# Allegro board CP210X_TEST_V10.brd
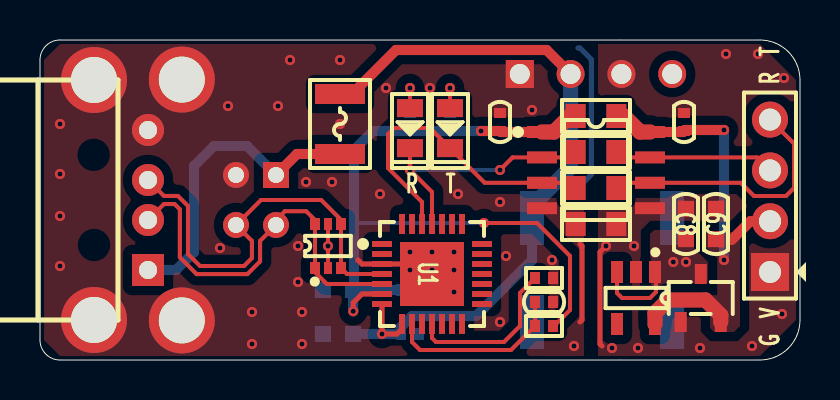
[diagram p0: board, top side]
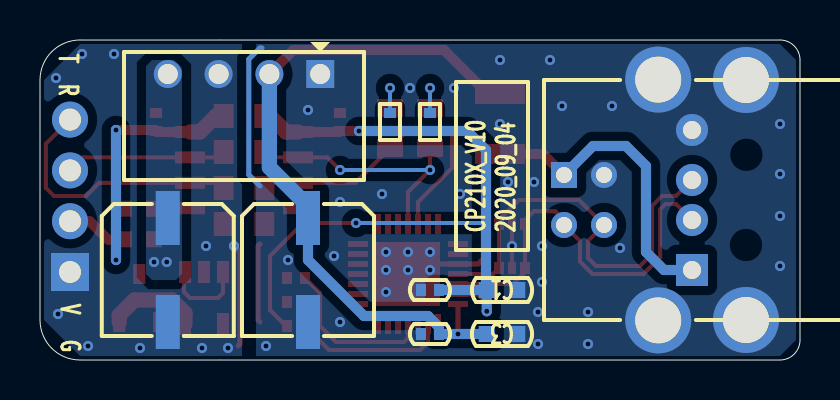
[diagram p1: board, bottom side, seen from below]

Outline 38 x 16 mm; copper layers: TOP, BOTTOM. Coordinates in mm from the lower left corner of the outline.
Outline path: 0,15 0,1 arc(0.29,0.29) 1,0 36,0 arc(37.41,0.59) 38,2 38,14 arc(37.41,15.41) 36,16 1,16 arc(0.29,15.71) 0,15

## Design rules (mm)
constraint set DEFAULT: min track width 0.203, pair gap 0.203
net group USB_D: nets USB_DM USB_DP

## Placement (name value [footprint] x y rotation side)
C1  10uF_10V  [C0603]  14.9 3.5 0 bottom
C2  100nF_50V  [C0402]  18.5 3.5 180 bottom
C3  10uF_10V  [C0603]  14.9 1.3 0 bottom
C4  100nF_50V  [C0402]  18.5 1.3 180 bottom
C5  100nF_50V  [C0402]  25.2 2.9 180 top
C6  220uF_10V  [CAP-6R3X7R7-SMD]  24.6 4.5 180 bottom
C7  220uF_10V  [CAP-6R3X7R7-SMD]  31.61 4.5 180 bottom
C8  10uF_10V  [C0603]  32.3 6.8 270 top
C9  10uF_10V  [C0603]  33.8 6.8 90 top
C10  100nF_50V  [C0402]  23 11.9 270 top
C11  100nF_50V  [C0402]  32.2 11.9 270 top
D1  LED_RED  [LED0805]  20.5 11.6 270 top
D2  LED_GREEN  [LED0805]  18.5 11.6 270 top
F1  SMD1210-200  [FUSE1210]  15 11.8 90 top
J1  -  [CN1X4-2P54-Z]  36.5 4.4 90 top
NOREF  -  []  0 0 0 top
NOREF#2  -  []  0 0 90 top
R1  10K  [R0402]  20.5 11.9 270 bottom
R2  10K  [R0402]  18.5 11.9 270 bottom
R3  10K  [R0402]  25.2 1.7 0 top
R4  10K  [R0402]  25.2 4.1 180 top
R5  0R/NI  [R0805]  27.8 12.2 0 top
R6  0R/NI  [R0805]  27.8 10.4 0 top
R7  0R/NI  [R0805]  27.8 8.6 0 top
R8  0R/NI  [R0805]  27.8 6.8 0 top
U1  CP2102-GMR  [QFN28-5X5X0R5-3R2X3R2]  19.6 4.3 270 top
U2  TPD4E1U06DCKR  [SOT363]  14.4 5.7 0 top
U3  -  [B0505S-1WR3]  27.8 14.3 0 bottom
U4  XC6206P332MR  [SOT23-3]  33.04 3.1 0 top
U5  ADUM1201BRZ  [SOIC8]  27.8 9.5 270 top
U6  SPX3819M5-L-3-3/NI  [SOT23-5]  29.8 3.1 180 top
USB1  -  [USB-A-MALE]  5.4 4.5 180 top
USB2  -  [USB-B]  11.8 8 180 bottom

## Library data of the parts
C1-C5 = CAP NP_2
C6 C7 = CAPT_100UF_3528_6r3V_10%_LXXXX
C8-C11 = CAP NP
D1 D2 = LED_4
F1 = FUSE
J1 = CONN RCPT 4
R1-R8 = R_Generic
U1 = CP2102_0
U2 = TPD4E1U06DBVR
U3 = B0505S-1WR2
U4 = XC6206P332MR
U5 = ADUM1201ARZ
U6 = SPX3819M5-L-1-2
USB1 = USB-A-MALE
USB2 = USB-B

## Footprints (pads in the part's own frame, mm; a bottom-side part is the same pattern mirrored in y, then rotated)
B0505S-1WR3
  rect 1.4x1.4 hole 1: 1(-3.81,0)
  round 1.4 hole 1: 2(-1.27,0) 3(1.27,0) 4(3.81,0)
C0402
  rect 0.5x0.6 smd: 1(-0.45,0) 2(0.45,0)
C0603
  rect 0.8x0.8 smd: 1(-0.762,0) 2(0.762,0)
CAP-6R3X7R7-SMD
  rect 1.2x2.7 smd: 1(0,2.6) 2(0,-2.6)
CN1X4-2P54-Z
  rect 1.9x1.9 hole 1.1: 1(0,0)
  round 1.8 hole 1.1: 2(2.54,0) 3(5.08,0) 4(7.62,0)
FUSE1210
  rect 1x2.5 smd: 1(-1.5,0) 2(1.5,0)
LED0805
  rect 0.9x1.3 smd: 1(-1,0) 2(1,0)
QFN28-5X5X0R5-3R2X3R2
  rect 0.3x1 smd: 1(-1.5,-2.5) 2(-1,-2.5) 3(-0.5,-2.5) 4(0,-2.5) 5(0.5,-2.5) 6(1,-2.5) 7(1.5,-2.5) 15(1.5,2.5) 16(1,2.5) 17(0.5,2.5) 18(0,2.5) 19(-0.5,2.5) 20(-1,2.5) 21(-1.5,2.5)
  rect 1x0.3 smd: 8(2.5,-1.5) 9(2.5,-1) 10(2.5,-0.5) 11(2.5,0) 12(2.5,0.5) 13(2.5,1) 14(2.5,1.5) 22(-2.5,1.5) 23(-2.5,1) 24(-2.5,0.5) 25(-2.5,0) 26(-2.5,-0.5) 27(-2.5,-1) 28(-2.5,-1.5)
  rect 3.2x3.2 smd: 29(0,0)
R0402
  rect 0.5x0.6 smd: 1(-0.45,0) 2(0.45,0)
R0805
  rect 1x1.2 smd: 1(-1.016,0) 2(1.016,0)
SOIC8
  rect 0.6x1.5 smd: 1(-1.9,-2.7) 2(-0.63,-2.7) 3(0.64,-2.7) 4(1.91,-2.7) 5(1.91,2.7) 6(0.64,2.7) 7(-0.63,2.7) 8(-1.9,2.7)
SOT23-3
  rect 0.6x1 smd: 1(-1,-1.2) 2(1,-1.2) 3(0,1.2)
SOT23-5
  rect 0.6x1.1 smd: 1(-0.95,-1.3) 2(0,-1.3) 3(0.95,-1.3) 4(0.95,1.3) 5(-0.95,1.3)
SOT363
  rect 0.5x0.6 smd: 1(-0.65,-1.1) 3(0.65,-1.1) 4(0.65,1.1) 6(-0.65,1.1)
  rect 0.4x0.6 smd: 2(0,-1.1) 5(0,1.1)
USB-A-MALE
  rect 1.6x1.6 hole 0.9: 1(0,0)
  round 1.6 hole 0.9: 2(0,-2.5) 3(0,-4.5) 4(0,-7)
  round 3.3 hole 2.3: 5(2.7,2.5) 6(2.7,-9.5)
USB-B
  rect 1.3x1.3 hole 0.8: 1(0,1.25)
  round 1.3 hole 0.8: 2(0,-1.25) 3(2,-1.25) 4(2,1.25)
  round 3.3 hole 2.3: 5(4.71,6.02) 6(4.71,-6.02)

## Nets
GND: C1.1 C2.1 C3.1 C4.1 C5.1 C6.2 C10.1 R4.1 R8.1 U1.3 U1.29 U2.2 U2.5(NC) U3.1 U5.4 USB1.4 USB1.5 USB1.6 USB2.4 USB2.5 USB2.6
GND_ISO: C7.2 C8.1 C9.2 C11.1 J1.1 R8.2 U3.3 U4.1(VSS) U5.5 U6.2
VCC_3.3V: C1.2 C2.2 C10.2 R1.2 R2.2 R3.2 R5.1 U1.6(VDD) U5.1
VCC_3.3V_ISO: C9.1 C11.2 J1.2 R5.2 U4.2 U5.8 U6.5(VOUT)
VCC_5V_ISO: C7.1 C8.2 U3.4 U4.3 U6.1 U6.3
VCC_USB: C3.2 C4.2 C6.1 F1.2 U1.7 U1.8 U3.2(VIN)
CP210X_RXD: D2.2(CATHODE) R6.1 U1.25 U5.2
CP210X_TXD: D1.2(CATHODE) R7.1 U1.26 U5.3
RXD: J1.3 R6.2 U5.7
TXD: J1.4 R7.2 U5.6(VOB)
USB_DM: U1.5 U2.1 U2.6 USB1.2 USB2.2
USB_DP: U1.4 U2.3 U2.4 USB1.3 USB2.3
N17444119: D1.1 R1.1
N17444149: C5.2 R3.1 U1.9
N17444179: D2.1 R2.1
N17494883: F1.1 USB1.1(VBUS) USB2.1(VBUS)
N17499797: R4.2 U1.11

Pads without a net: U1 1 2 10 12 13 14 15 16 17 18 19 20 21 22 23 24 27 28; U6 4

## Via types
v1: diameter 0.508, hole 0.254, TOP to BOTTOM, 58 vias

## Routing (per net, layer and track width the routed paths; a pad name or vN(x,y) marks a point on that pad's centre or on a via; arc(x,y) is an arc through that point)
GND: length 17.6
  TOP w0.203: U2.2 v1(14.4,5.7) U2.5
  TOP w0.254: 27,5.8 27.1,5.7 27.1,2 27,1.9 ; 15.9,5 16.1,4.8 U1.3 19.1,4.8 U1.29
  BOTTOM w0.254: 26.9,15.6 27,15.6 27.56,15.04 27.56,9.26 27,8.7
  vias: v1(1,11.8) v1(1,9.3) v1(1,7.2) v1(1,4.7) v1(9,5.6) v1(9.4,12.7) v1(10.6,2.4) v1(10.6,0.8) v1(11.9,12.7) v1(12.5,15) v1(12.9,5.7) v1(12.9,3.9) v1(13.1,2.4) v1(13.1,0.8) v1(13.3,8.9) v1(14.6,8.9) v1(15,15) v1(15,11.8) v1(17,8.3) v1(17.3,13.6) v1(18.5,5.4) v1(18.5,4.5) v1(19.5,13.6) v1(19.6,5.4) v1(19.6,4.5) v1(20.7,5.4) v1(20.7,4.5) v1(20.7,3.4) v1(20.9,8.3) v1(23,7.9) v1(23,1.9) v1(23.3,5.2) v1(24.6,12.5) v1(25.6,5) v1(26.7,0.7)
GND_ISO: length 4.9
  TOP w0.254: 28.1,0.7 28,0.8 28,5.4 28.1,5.5
  vias: v1(28.3,5.7) v1(28.6,0.6) v1(29.7,5.7) v1(29.9,0.6) v1(33,0.6) v1(34.3,15.3) v1(35.6,0.7) v1(35.9,15.3) v1(37.1,2.3) v1(37.2,14.1)
VCC_3.3V: length 39.7
  TOP w0.203: R3.2 25.7,1.7 26.5,2.5 26.5,5.2 24.85,6.85 v1(22.2,6.85)
  TOP w0.254: U1.6 16.1,3.3 15.66,2.86 v1(15.66,2.44)
  TOP w0.508: U5.1 23.05,11.4 C10.2 v1(22.05,11.45)
  TOP w0.762: R5.1 26.5,12.2 25.7,11.4 U5.1
  BOTTOM w0.203: v1(22.2,6.85) 15.7,6.85
  BOTTOM w0.508: C1.2 15.7,3.54 15.7,10.5 16.65,11.45 R2.2 R1.2 v1(22.05,11.45) ; C1.2 C2.2 ; C1.2 v1(15.66,2.44)
VCC_3.3V_ISO: length 19.3
  TOP w0.508: v1(34.2,11.5) 32.25,11.5 C11.2 32.15,11.4 U5.8 ; 34.58,6 35.52,6.94 J1.2
  TOP w0.762: U6.5 30.75,2.35 31.4,3 33.28,3 34.04,2.24 U4.2 ; U5.8 30,11.4 29.2,12.2 R5.2
  BOTTOM w0.508: v1(34.2,11.5) v1(34.2,5)
VCC_5V_ISO: length 4.3
  TOP w0.203: U6.1 30.7,4.35 30.8,4.25 30.8,3.4 30.5,3.1 29.1,3.1 28.85,3.35 U6.3
  vias: v1(31.66,4.9) v1(32.3,4.9)
VCC_USB: length 36.6
  TOP w0.254: U1.8 18.1,1.55 17.85,1.3 v1(17.1,1.3) U1.7
  TOP w0.508: F1.2 15.6,13.3 17.8,15.5 25.33,15.5 U3.2
  BOTTOM w0.508: C6.1 24.6,5 21.8,2.2 18.6,2.2 18.05,1.65 C4.2 v1(17.1,1.3) C3.2
  BOTTOM w0.762: U3.2 26.53,9.63 24.6,7.7 C6.1
CP210X_RXD: length 12.9
  TOP w0.203: v1(23,9.5) 23.63,10.13 U5.2 26.51,10.13 R6.1 ; U1.25 19.6,8.4 v1(18.5,9.5) D2.2
  BOTTOM w0.203: v1(23,9.5) v1(18.5,9.5)
CP210X_TXD: length 16
  TOP w0.203: U1.26 19.1,7.9 17.4,9.6 17.4,11.3 17.7,11.6 19.5,11.6 D1.2 22.24,8.86 U5.3 26.52,8.86 R7.1
RXD: length 8.1
  TOP w0.203: J1.3 35.85,10.13 U5.7 29.09,10.13 R6.2
TXD: length 13.4
  TOP w0.203: R7.2 29.08,8.86 U5.6 35.04,8.86 35.7,8.2 37.3,8.2 37.7,8.6 37.7,10.82 J1.4
USB_DM: length 20
  TOP w0.203: U1.5 14.34,3.8 13.75,4.39 U2.1 U2.6 13.75,7 13.31,7.44 12.24,7.44 11.8,7 USB2.2 11,5.95 11,4.93 10.37,4.29 7.83,4.29 6.99,5.13 6.99,7.53 6.73,7.8 6.2,7.8 USB1.2
USB_DP: length 21.3
  TOP w0.203: USB1.3 6.2,8.2 6.9,8.2 7.4,7.7 7.4,5.3 8,4.7 10.2,4.7 10.6,5.1 10.6,5.95 USB2.3 11.05,8 14.06,8 15.05,7.01 U2.4 U2.3 15.35,4.3 U1.4
N17444119: length 2.3
  TOP w0.203: D1.1 v1(20.5,13.6)
  BOTTOM w0.203: v1(20.5,13.6) R1.1
N17444149: length 8.9
  TOP w0.203: C5.2 R3.1 23.55,0.5 19,0.5 18.6,0.9 U1.9
N17444179: length 2.3
  TOP w0.203: D2.1 v1(18.5,13.6)
  BOTTOM w0.203: v1(18.5,13.6) R2.1
N17494883: length 15.7
  TOP w0.508: USB2.1 12.85,10.3 F1.1
  BOTTOM w0.508: USB1.1 6.8,4.5 7.7,5.4 7.7,9.7 8.7,10.7 10.35,10.7 USB2.1
N17499797: length 8.2
  TOP w0.203: R4.2 24,3.35 24,1.7 23.2,0.9 19.8,0.9 19.6,1.1 U1.11

## Copper pours and planes (outline as drawn; the poured copper is in the pictures)
GND on TOP: 1,15.8 27.2,15.8 27.2,0.2 1,0.2 0.2,1 0.2,15 ; 1 cut-out
GND on BOTTOM: 1,15.8 27.2,15.8 27.2,0.2 1,0.2 0.2,1 0.2,15 ; 1 cut-out
GND_ISO on TOP, BOTTOM: 27.9,0.2 36,0.2 37.8,2 37.8,14 36,15.8 27.9,15.8
VCC_3.3V_ISO on TOP: 33.3,6.4 34.9,6.4 35,6.3 35,1.7 34.7,1.4 33.7,1.4 33.5,1.6 33.5,5.3 33.3,5.5
VCC_5V_ISO on TOP: 30.6,3.7 33.4,3.7 33.4,4.9 32.7,5.6 32.7,6.5 30.7,6.5 30.5,6.3 30.5,3.8
VCC_5V_ISO on BOTTOM: 31.3,15 32.4,15 32.7,14.7 32.7,4.3 32.4,4 31.2,4 30.9,4.3 30.9,14.6

## Text on the board
Ref Des/Silkscreen Bottom: V | G | T | R | 2020_09_04 | CP210X_V10
Ref Des/Silkscreen Top: R | T | V | G
DEVICE_TYPE_TOP: FIGURE | FINISHED_SIZE | 0.254 | 0.8 | 0.9 | 1.0 | 1.1 | 2.3 | DRILL CHART: TOP to BOTTOM | ALL UNITS ARE IN MILLIMETERS | PLATED | QTY | 58 | 4 | 78 | TOTAL HOLES:
